# Altium PCB sheet_cc.PcbDoc
Units mm, origin at the board's own origin, x right, y up, seen from the top; angles counter-clockwise.
Board outline 152.4 x 101.6 mm, 2 copper layers (Top Layer, Bottom Layer); 16 components, 13 nets, 45 pads, 0 vias.
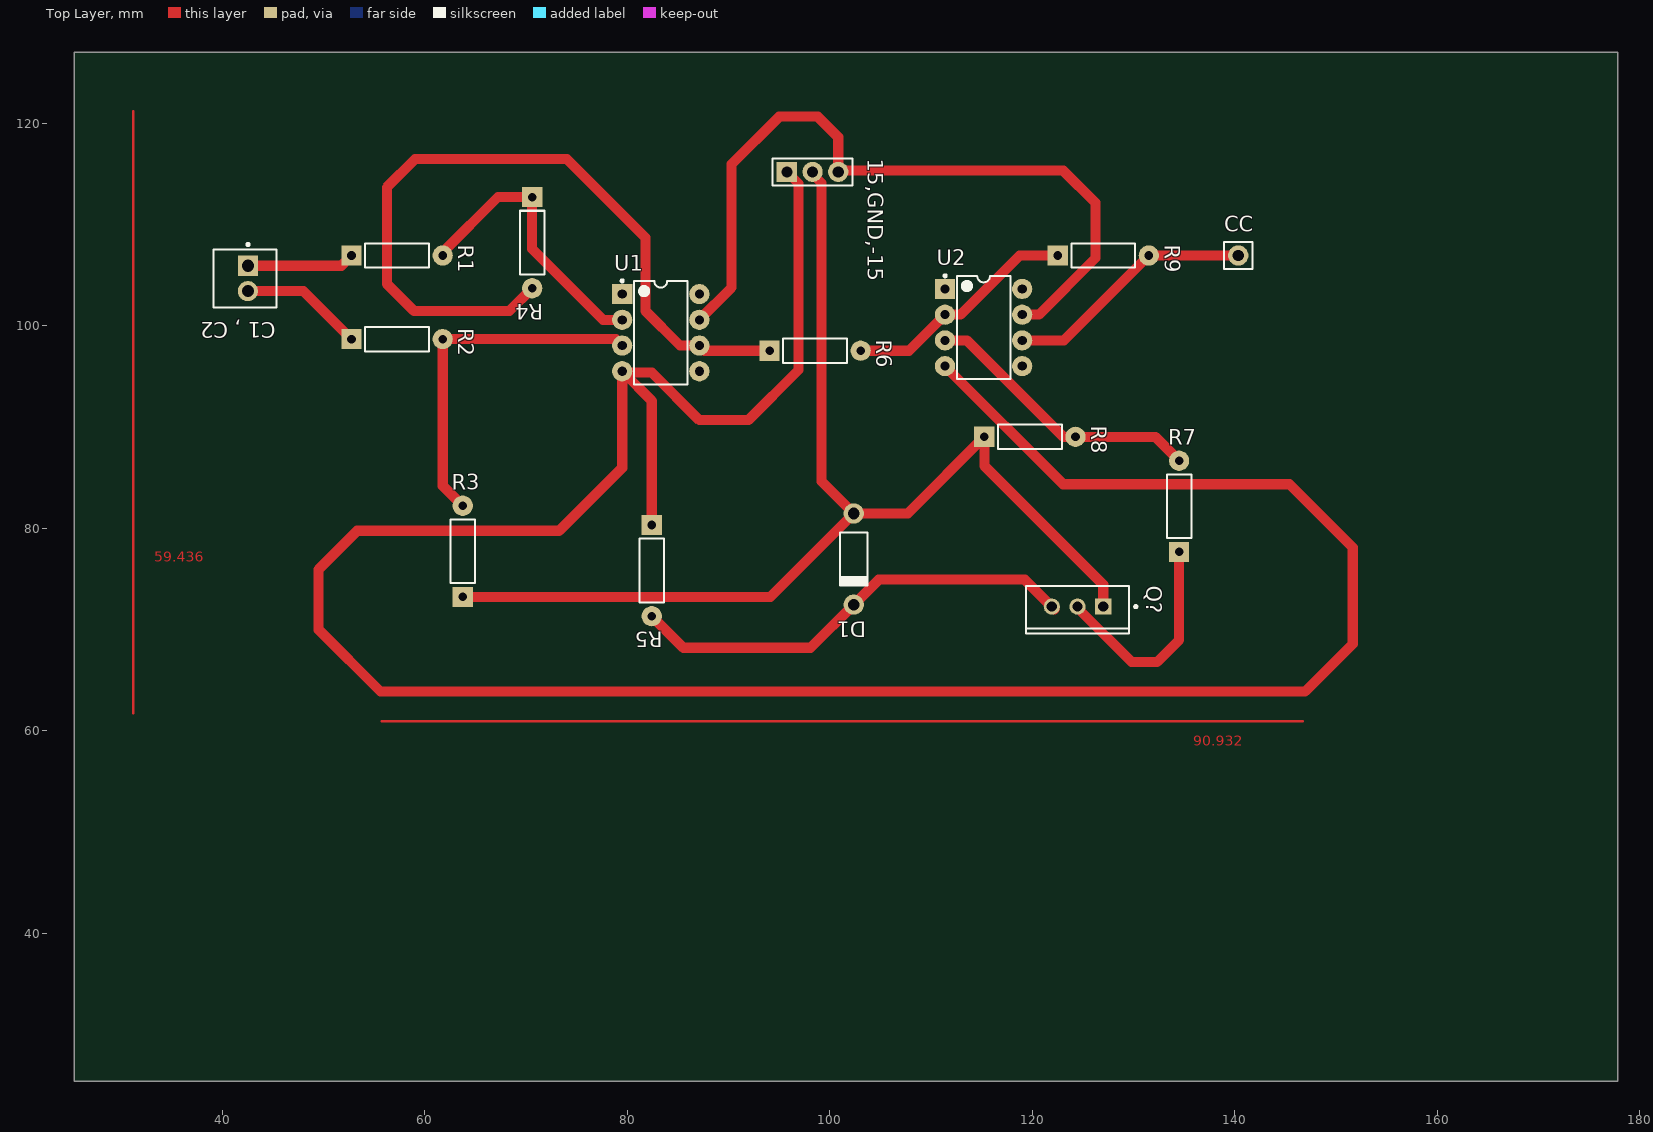
[diagram p0: Top Layer view]
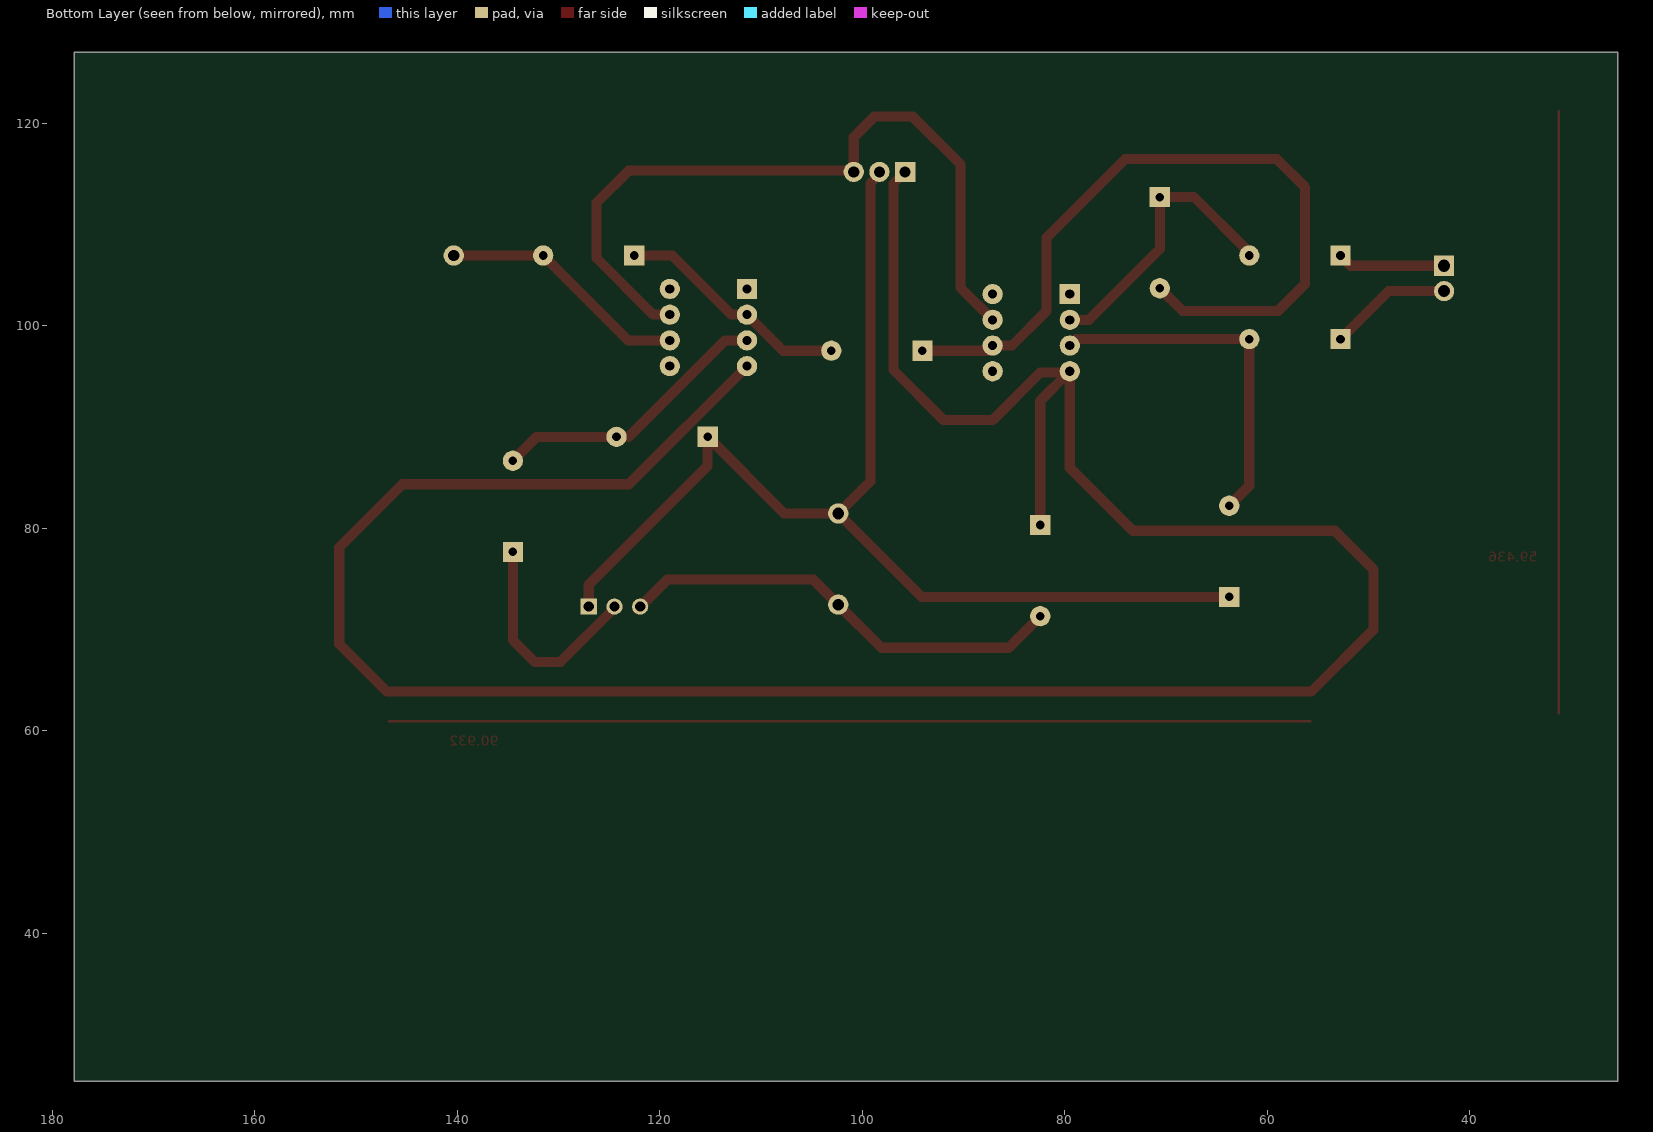
[diagram p1: Bottom Layer view, seen from below]

## Layer stack, top to bottom
Top Solder: solder mask 0.0102, Solder Resist, Dk 3.5
Top Layer: signal copper 0.0356
Dielectric 1: dielectric 0.32, FR-4, Dk 4.8
Bottom Layer: signal copper 0.0356
Bottom Solder: solder mask 0.0102, Solder Resist, Dk 3.5

## Board outline
25.4,25.4 177.8,25.4 177.8,127 25.4,127

## Design rules (kind name [scope] priority, off if disabled: settings)
Clearance [All] p1: gap=0.254 ignorepadtopadclearanceinfootprint=FALSE except(0: Arc-Hole Track-Hole SMDPad-Hole THPad-Hole Via-Hole Fill-Hole Poly-Hole Region-Hole Text-Hole)
PolygonConnect [All] p1: connectstyle=Relief reliefconductorwidth=0.254 reliefentries=4 polygonreliefangle="90 Angle" airgapwidth=0.254
RoutingVias [All] p1: holewidth=0.711 width=1.27 viastyle="Through Hole" minholewidth=0.711 minwidth=1.27 maxholewidth=0.711 maxwidth=1.27
SolderMaskExpansion [All] p1: expansion=0.102 istentingtop=FALSE
Width [All] p1: maxlimit=1.1 minlimit=0.254 preferedwidth=1
30 further rules are at their usual default settings.

## Components (designator, comment, footprint, x,y, rotation, side; value= is the part's Value field where it differs from the comment)
15,GND,-15 "61300311121" 61300311121 98.298,115.189 r0 top
"C1 , C2" "22-04-1021" FP-22-04-1021-MFG 42.245,104.668 r270 top
CC "61300111121" 61300111121 140.335,106.934 r0 top
D1 "1N4728A" FAIR-DO-41-2_V 102.362,76.962 r270 top
Q? "" FAIR-TO-220-3 124.46,72.263 r270 top
R1 "10K" RESA60-630X240 57.277,106.934 r0 top
R2 "10K" RESA60-630X240 57.277,98.679 r0 top
R3 "33K" RESA60-630X240 63.754,77.724 r90 top
R4 "33K" RESA60-630X240 70.612,108.204 r270 top
R5 "1k" RESA60-630X240 82.423,75.819 r270 top
R6 "2.2K" RESA60-630X240 98.552,97.536 r0 top
R7 "2.2K" RESA60-630X240 134.493,82.169 r90 top
R8 "330K" RESA60-630X240 119.761,89.027 r0 top
R9 "330K" RESA60-630X240 127,106.934 r0 top
U1 "LM741CN/NOPB" P0008A 83.312,99.314 r0 top
U2 "LM741CN/NOPB" P0008A 115.189,99.822 r0 top

## Footprints (in the part's own frame and the unit in brackets; to place one, negate y for a bottom-side part, rotate by r counter-clockwise, add the part's x,y. Pads: shape width x height; smd on the part's side, far side on the other; paste and mask are expansions set on the pad)
61300111121 [mm] "Pin Header, pitch 2.54 mm, THT, Vertical, single row, 1p"
  round 2 hole 1.1: 1(0,0)
  silkscreen extent -1.42,-1.34 1.42,1.34, body extent -1.27,-1.27 1.27,1.27, height 8.57
61300311121 [mm] "Pin Header, pitch 2.54 mm, THT, Vertical, single row, 3p"
  rect 2x2 hole 1.1: 1(-2.54,0)
  round 2 hole 1.1: 2(0,0) 3(2.54,0)
  silkscreen extent -3.96,-1.34 3.96,1.34, body extent -3.81,-1.27 3.81,1.27, height 8.57
FAIR-DO-41-2_V [mm] "2-Leads, Axial leaded, Body 2.72x5.2mm, Pin Spacing 9mm"
  round 2 hole 1.15: 1(-4.5,0) 2(4.5,0)
  silkscreen extent -2.6,-1.36 2.6,1.36, body extent -4.93,-1.36 4.93,1.36, height 2.71
FAIR-TO-220-3 [mm] "FM, 3-Leads, Body 10.2x4.7mm, Pitch 2.54mm"
  rect 1.6x1.6 hole 1: 1(0,2.54)
  round 1.6 hole 1: 2(0,0) 3(0,-2.54)
  silkscreen extent -2.04,-5.1 2.66,5.88, body extent -2.04,-5.1 2.66,5.1, height 18.95
FP-22-04-1021-MFG [mm]
  rect 2x2 hole 1.2 paste-1000 mask+0: 1(-1.25,0.3)
  round 2 hole 1.2 paste-1000 mask+0: 2(1.25,0.3)
  silkscreen extent -3.47,-3.1 2.85,3.1, body extent -2.95,-3.2 2.95,3.2, height 0.25
P0008A [mm] "DIP, 8-Leads, Body 10.15x6.6mm, Pitch 2.54mm"
  rect 2x2 hole 0.9: 1(-3.81,3.81)
  round 2 hole 0.9: 2(-3.81,1.27) 3(-3.81,-1.27) 4(-3.81,-3.81) 5(3.81,-3.81) 6(3.81,-1.27) 7(3.81,1.27) 8(3.81,3.81)
  silkscreen extent -3.93,-5.1 2.65,5.23, body extent -3.95,-5.07 3.95,5.07, height 5.08
RESA60-630X240 [mm] "Axial Resistor, 2-Leads, Dia 2.4mm, Body Length 6.3mm"
  rect 2x2 hole 0.85: 1(-4.5,0)
  round 2 hole 0.85: 2(4.5,0)
  silkscreen extent -3.15,-1.2 3.15,1.2, body extent -3.15,-1.2 3.15,1.2, height 2.4

## Part data
15,GND,-15: library part CMP-1502-01062-1, "THT Vertical Pin Header WR-PHD, Pitch 2.54 mm, Single Row, 3 pins", Contact Resistance=20mOhm, Manufacturer="Wurth Elektronik", Operating Temperature=-40to105degC, Rated Current=3A, Withstanding Voltage=500VAC, Working Voltage=250VAC, Datasheet URL=https://katalog.we-online.de/em/datasheet/6130xx11121.pdf, Gender=Male, Manufacturer URL=http://www.we-online.de, Mounting Technology=THT, Orientation=Vertical, Package Reference=61300311121, Packaging=Bag, Part Number=61300311121, Pin Number=3, Pitch=2.54mm, Publisher=WurthElektronik, Row Number=Single
"C1 , C2": library part CMP-04776-000257-1, "CONN HEADER VERT 2POS 2.5MM", Flammability Rating="UL94 V-0", Insulation Color=Natural, Insulation Resistance=1GR, Package Quantity=1000, Voltage Rating (DC)=250V, Connector Type=Header, Contact Material=Tin, Contact Mating Length=0.295inch, Contact Plating=Tin, Contact Post Length=0.134inch, Contact Shape=Square, Contact Type=-, Fastening Type=Friction, Gender=Male, Glow Wire Compliant=Non-compliant, Halogen Free="Low Halogen", Insulation Height=0.461inch, Insulation Material=Nylon, Lead Free="Lead Free", Mount="Through Hole", Number of Circuits=2, Number of Positions=2, Number of Rows=1, Packaging=Bulk, RoHS Compliant=Yes, Series=5045, Termination="Through Hole", Weight=0.007055oz
CC: library part CMP-1502-01058-1, "THT Vertical Pin Header WR-PHD, Pitch 2.54 mm, Single Row, 1 pins", Contact Resistance=20mOhm, Manufacturer="Wurth Elektronik", Operating Temperature=-40to105degC, Rated Current=3A, Withstanding Voltage=500VAC, Working Voltage=250VAC, Datasheet URL=https://katalog.we-online.de/em/datasheet/6130xx11121.pdf, Gender=Male, Manufacturer URL=http://www.we-online.de, Mounting Technology=THT, Orientation=Vertical, Package Reference=61300111121, Packaging=Bag, Part Number=61300111121, Pin Number=1, Pitch=2.54mm, Publisher=WurthElektronik, Row Number=Single
D1: library part CMP-0892-00028-1, "Zener Diode, 3.3V, 1W, 5%, -65 to 200 degC, 2-Pin DO-41, Body 2.72 x 5.2 mm, RoHS", Manufacturer="Fairchild Semiconductor", Operating and Storage Temperature Range="-65 to 200 degC", Test Current IZ (mA)=76, Tolerance=5%, ComponentLink1Description="Manufacturer URL", ComponentLink1URL=http://www.fairchildsemi.com/, ComponentLink2Description=Datasheet, ComponentLink2URL=http://www.fairchildsemi.com/ds/1N/1N4744A.pdf, ComponentLink3Description="Package Specification", ComponentLink3URL=http://www.fairchildsemi.com/dwg/DO/DO41A.pdf, DatasheetVersion="Rev. H3", IR (uA)=100, Mounting Technology="Through Hole", PackageDescription="2-Pin Axial leaded, Body 2.72 x 5.2 mm, Lead Spread 25.4 mm", PackageReference=DO-41-2, PackageVersion="Rev. 2", PartNumber=1N4728A, PD (W)=1, RoHS=TRUE, VZ (Max.) (V)=3.465, VZ (Min.) (V)=3.135, ZZ (Max) (ohm)=10
Q?: library part CMP-2000-04938-1, "Positive Voltage Regulator, 5 V, 1 A, -40 to 125 degC, 3-Pin TO-220, RoHS, Tube", Manufacturer=FairchildSemiconductor, Maximum Input Voltage=35V, Maximum Output Current=2.2(Typ)A, Maximum Quiescent Current=8mA, Operating Temperature=-40to125degC, Output Voltage=5V, Package=3TO-220AB, Package Description="3-Pin Through Hole Device, Body 10 x 4.5 mm, Pitch 2.54 mm", Package Reference=TO-220, Typical Dropout Voltage @ Current=2@1AV, Accuracy=±4%, Category=LinearRegulator, Datasheet URL=https://datasheet.ciiva.com/26904/lm7805ct-26904988.pdf, Datasheet Version=Aug-12, Line Regulation=100mV, Load Regulation=100mV, Manufacturer URL=https://www.fairchildsemi.com/, Mounting=ThroughHole, Number of Outputs=1, Output Type=Fixed, Package URL=https://www.fairchildsemi.com/package-drawings/TO/TO220B03.pdf, Packaging=Rail/Tube, Polarity=Positive, Rad Hard=No, Type=Linear
R1 R2 R3 R4 R5 R6 R7 R8 R9: library part CMP-1659-00075-1, "Axial Resistor, 1 KOhm, +/- 1%, 250 mW, -55 to 155 degC, 2-Pin THD, RoHS, Bulk", Case\Package=Axial, Max Operating Temperature="155 degC", Min Operating Temperature="-55 degC", Package Quantity=200, Power Rating="250 mW", Resistance="10 kohm", Tolerance=1%, Voltage Rating="250 V", ComponentLink1Description="Manufacturer URL", ComponentLink1URL=http://www.yageo.com/, ComponentLink2Description=Datasheet, ComponentLink2URL=http://www.yageo.com/documents/recent/Yageo%20LR_MFR_2013.pdf, DatasheetVersion=Apr-13, Length="0.248 inch", PackageDescription="2-Pin Axial Lead, Dia 2.4 mm, Body Length 6.3 mm", PackageReference=MFR-25, Packaging=Bulk, RoHSCompliant=true
U1 U2: library part CMP-0055-00162-3, "Operational Amplifier, 8-pin MDIP, Pb-Free", Manufacturer="Texas Instruments", Package Reference=P0008A, PackageTopMarking=NSUZXYTTE#*LM*741CN, PowerWise=N, Code_JEDEC=MS-001-BA, ComponentLink1Description="Datasheet URL", ComponentLink1URL=http://www.ti.com/general/docs/lit/getliterature.tsp?genericPartNumber=LM741&fileType=pdf, CompType=Amplifiers, PackageDescription="MDIP, .365 x .250 x .130in, 8 Lead, .100in Pitch", PinCount=8, RoHS=Y

## Nets (pads, with @x,y where several pads share a name; then routed paths per layer and width w, separated by ;. In a path a pad name is that pad's centre, name@x,y a point inside that pad or via, vN(x,y) a via of type N, cw(c..) or ccw(c..) an arc to the next point about the centre after c; other vN are vias at no path point)
+15: 15,GND,-15.1 R5.1 U1.4 U2.4 | length 271.1
  Top Layer w1: R5.1 82.423,92.583 U1.4@79.629,95.377 ; 95.758,115.189 96.901,114.046 96.901,95.631 91.948,90.678 87.122,90.678 82.423,95.377 U1.4@79.629,95.377 ; U2.4 123.039,84.352 145.391,84.352 151.638,78.105 151.638,68.58 146.939,63.881 55.626,63.881 49.53,69.977 49.53,75.946 53.34,79.756 73.279,79.756 79.502,85.979 U1.4 U1.4@79.629,95.377
-15: 15,GND,-15.3 U1.7 U2.7 | length 75.2
  Top Layer w1: U1.7 90.297,103.759 90.297,115.951 94.996,120.65 98.806,120.65 100.838,118.618 100.838,115.189 100.965,115.316 123.063,115.316 126.238,112.141 126.238,106.68 120.65,101.092 U2.7
C1: "C1 , C2.2" R2.1 | length 12.2
  Top Layer w1: 42.545,103.418 48.038,103.418 R2.1
C2: "C1 , C2.1" R1.1 | length 10.7
  Top Layer w1: 42.545,105.918 51.761,105.918 R1.1
CC: CC.1 R9.2 U2.6 | length 24.8
  Top Layer w1: U2.6 123.118,98.552 R9.2 CC.1
GND: 15,GND,-15.2 D1.1 Q?.1 R3.1 R8.1 | length 115.1
  Top Layer w1: R3.1 94.124,73.224 D1.1 ; 98.298,115.189 98.298,114.992 99.187,114.103 99.187,84.637 D1.1 ; Q?.1 127,74.422 115.261,86.161 R8.1 107.696,81.462 D1.1
NetD1_2: D1.2 Q?.3 R5.2 | length 45
  Top Layer w1: R5.2 85.543,68.199 98.099,68.199 D1.2 104.83,74.93 119.253,74.93 Q?.3 Q?.3@122.174,72.009
NetQ?_2: Q?.2 R7.1 | length 22
  Top Layer w1: Q?.2 124.46,72.137 129.807,66.79 132.322,66.79 134.493,68.961 R7.1
NetR1_2: R1.2 R4.1 U1.2 | length 28.3
  Top Layer w1: R1.2 61.844,107.001 61.844,107.31 67.238,112.704 R4.1 70.612,107.569 77.597,100.584 U1.2
NetR2_2: R2.2 R3.2 U1.3 | length 35.3
  Top Layer w1: R3.2 61.777,84.201 R2.2 78.867,98.679 U1.3
NetR4_2: R4.2 R6.1 U1.6 | length 76.9
  Top Layer w1: R4.2 68.381,101.473 58.928,101.473 56.261,104.14 56.261,113.665 59.055,116.459 74.041,116.459 81.788,108.712 81.788,101.473 85.217,98.044 U1.6 87.63,97.536 R6.1
NetR6_2: R6.2 R9.1 U2.2 | length 23.3
  Top Layer w1: R6.2 107.823,97.536 U2.2 112.903,101.092 118.745,106.934 R9.1
NetR7_2: R7.2 R8.2 U2.3 | length 28
  Top Layer w1: U2.3 113.538,98.552 123.063,89.027 132.135,89.027 R7.2
pads on no net: U1.1 U1.5 U1.8 U2.1 U2.5 U2.8
copper on no net: | length 150.4
  Top Layer w0.254: 31.242,61.722 31.242,121.158 ; 55.753,60.96 146.685,60.96

## Other copper
Top Layer:
  text "59.436" at 33.274,76.708 h1
  text "90.932" at 135.89,58.547 h1